# Altium PCB Sunfish_ECU_RevA.PcbDoc (part 2 of 2)
Units mil, origin at the board's own origin, x right, y up, seen from the top; angles counter-clockwise.
Board outline 3150 x 5900 mil, 4 copper layers (Top Layer, GND, Power, Bottom Layer); 197 components, 100 nets, 618 pads, 220 vias.
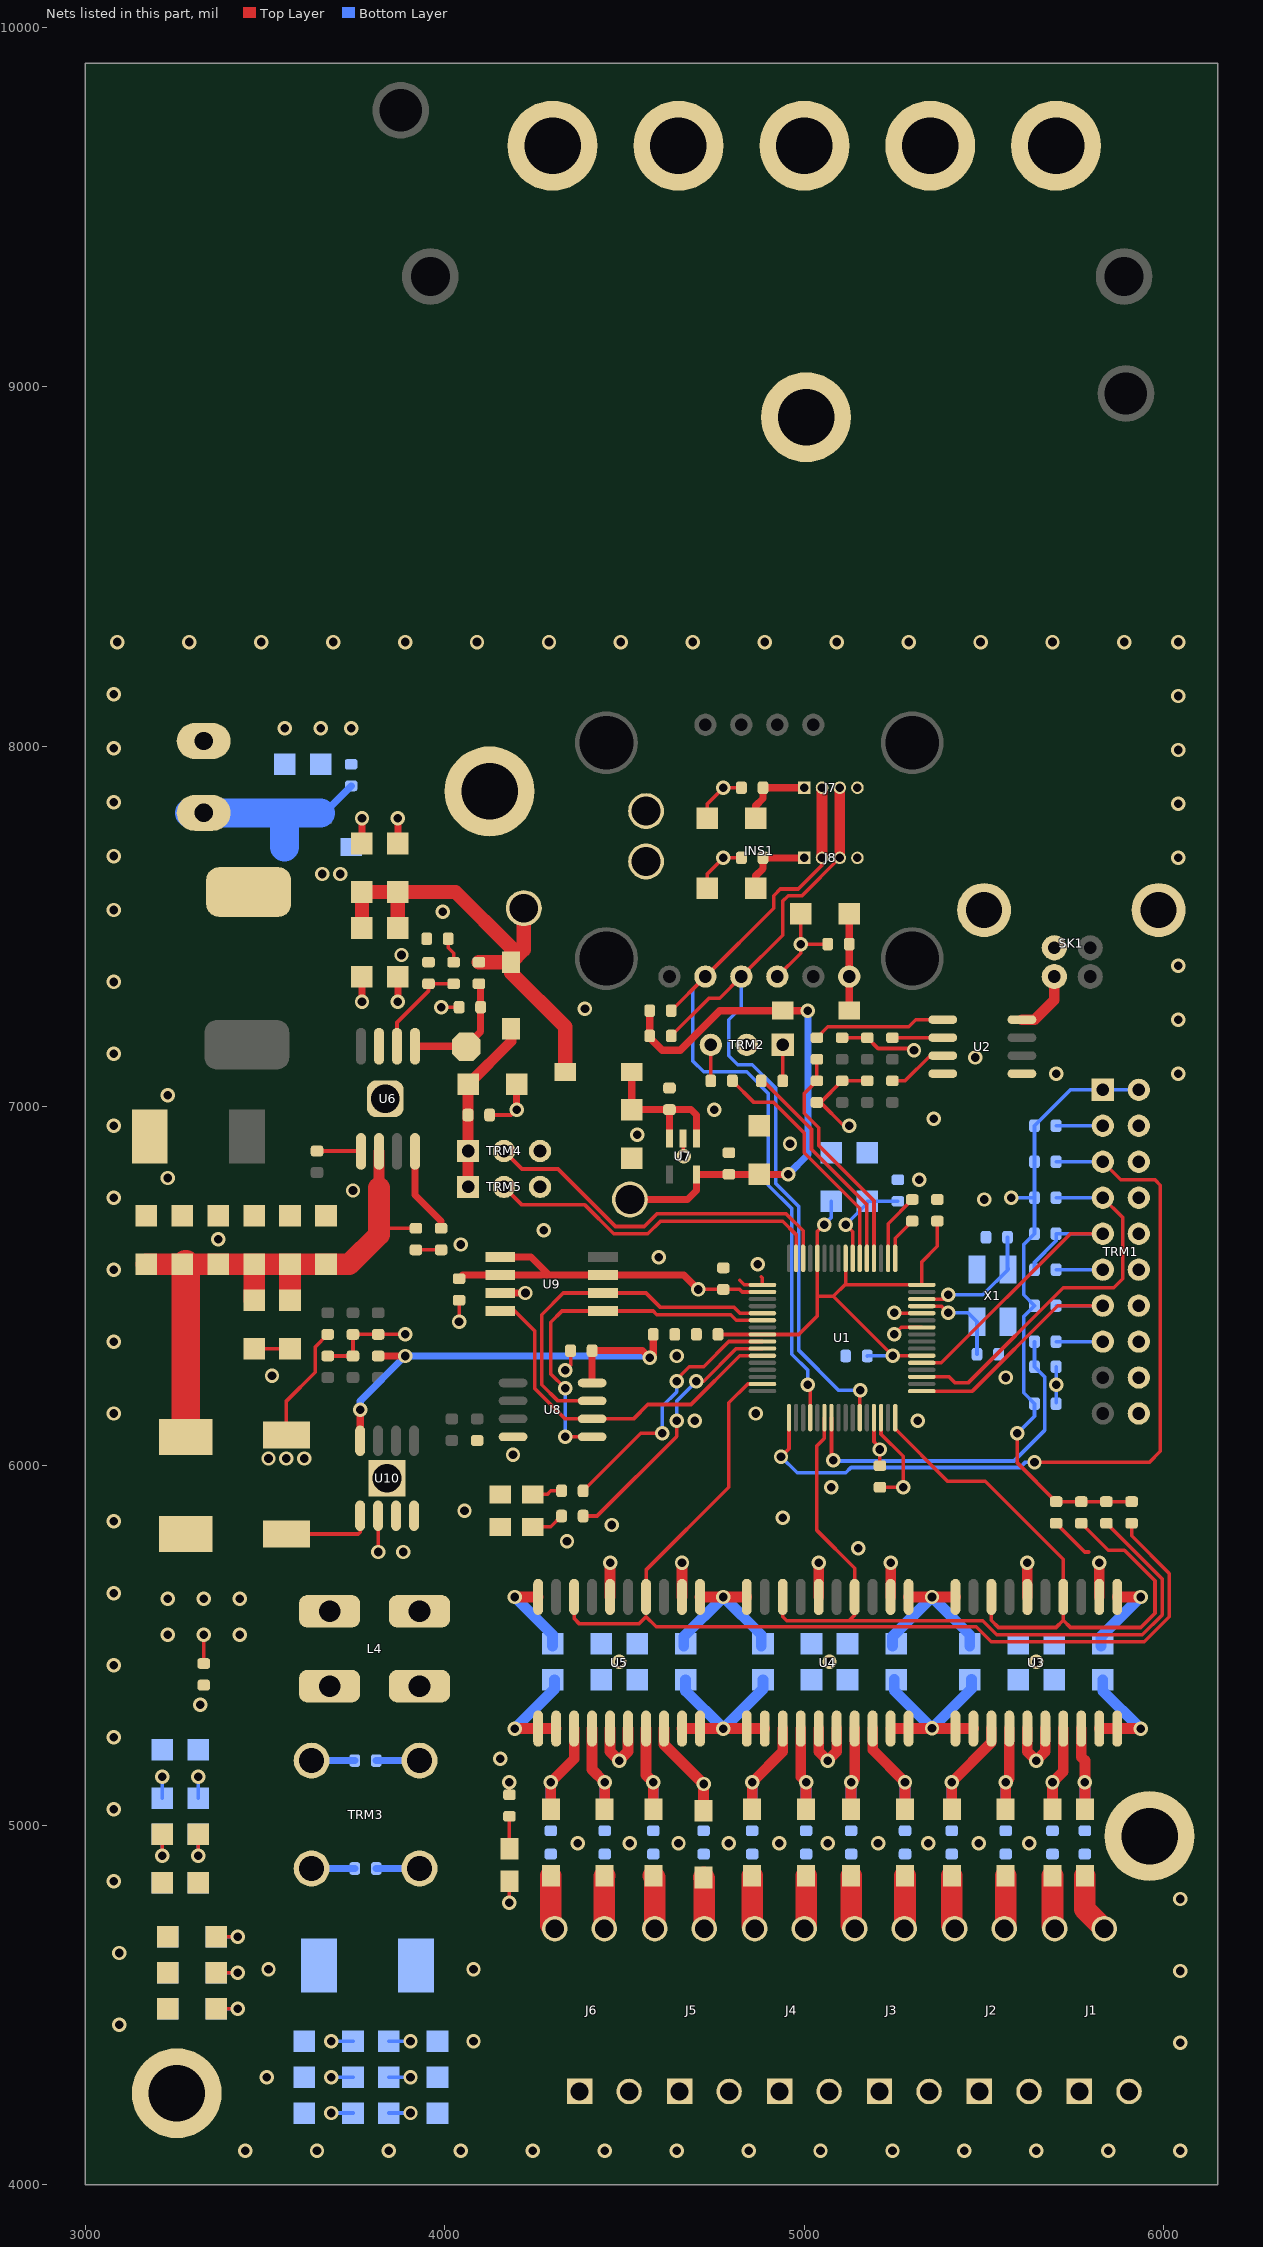
[diagram p4: the nets of this part, all layers, seen from the top]

## Via types
v1: diameter 40, hole 24, Top Layer to Bottom Layer, tented both sides, 220 vias

## Nets (pads, with @x,y where several pads share a name; then routed paths per layer and width w, separated by ;. In a path a pad name is that pad's centre, name@x,y a point inside that pad or via, vN(x,y) a via of type N, cw(c..) or ccw(c..) an arc to the next point about the centre after c; other vN are vias at no path point) (continued)
GND: C1.2 C2.2 C3.2 C4.2 C5.2 C6.2 C7.2 C8.2 C9.2 C10.2 C11.2 C12.2 C13.2 C14.2 C15.2 C16.2 C17.2 C18.2 C19.2 C20.2 C21.2 C22.2 C23_UF1.2 C23_UF2.2 C23_UF3.2 C23_UF4.2 C23_UF5.2 C23_UF6.2 C23_UF7.2 C23_UF8.2 C23_UF9.2 C23_UF10.2 C23_UF11.2 C23_UF12.2 C24_UF1.2 C24_UF2.2 C24_UF3.2 C24_UF4.2 C24_UF5.2 C24_UF6.2 C24_UF7.2 C24_UF8.2 C24_UF9.2 C24_UF10.2 C24_UF11.2 C24_UF12.2 C25.2 C26.2 C28.2 C29.2 C30.2 C31.2 C32.2 C33.2 C34.2 C35.2 C36.2 C37.2 C38.2 C39.2 C40.2 C41.2 C42.2 C43.2 C44.2 C45.2 C46.2 C47.2 C49.2 C50.2 C51.2 C52.2 C53.2 C55.2 C56.2 C57.2 C58.2 C59.2 C60.2 C61.2 C62.2 C63.2 C64.2 C65.2 C66.2 C67.2 C68.2 C69.2 C70.2 C71.2 C72.2 C73.2 C74.2 C75.2 C76.2 C77.2 C78.2 C79.2 C80.2 C81.2 C82.2 C83.2 C84.2 C85.2 C86.2 C87.2 C88.2 C110.2 D2.A INS1.3 J1.1 J1.2 J2.1 J2.2 J3.1 J3.2 J4.1 J4.2 J5.1 J5.2 J6.1 J6.2 J7.4 J8.4 L4.3 LD1.K LD2.K LD3.K pad.0@3255,4255 pad.0@3840,5965 pad.0@4125,7875 pad.0@4300,9670 pad.0@4650,9670 pad.0@5000,9670 pad.0@5005,8915 pad.0@5350,9670 pad.0@5700,9670 pad.0@5960,4970 pad.1 pad.5 R1.1 R5.1 R6.1 R19.2 R24.1 R30.1 SK1.4 SK1.5 SK1.6 TRM1.4 TRM1.6 TRM1.8 TRM1.10 TRM1.12 TRM1.14 TRM1.16 TRM1.18 TRM1.20 TRM2.2 TRM4.3 TRM5.3 TRM6.2 U1.2 U1.17 U1.46 U1.60 U2.4 U2.5 U3.2 U3.6 U4.2 U4.6 U5.2 U5.6 U6.7 U6.9 U7.2 U8.4 U9.7 U10.3 U10.4 U10.9 X1.2 X1.4 | length 3741.4
  Top Layer w10: C85.2@3470,6325 C51.2@3570,6325 ; R30.1@3675,6305 C61.2@3745,6305 R24.1@3745,6365 C50.2@3815,6365 v1(3890,6365) ; C26.2@3910,6600 C26.2@3920,6600 C35.2@3990,6600 ; C34.2@3950,7460 C34.2@3950,7465 ; v1(3990,7275) R19.2@4040,7275 ; v1(4040,6400) C47.2@4040,6460 ; C44.2@4125,6975 4185,6975 v1(4200,6990) ; v1(4180,4785) LD2.K@4180,4845 ; v1(4335,6265) 4350,6280 C41.2@4350,6320 ; U7.2@4662.99,6910 4662.99,6862.01 v1(4665,6860) ; C83.2@4730,7605 4730,7645 v1(4775,7690) C88.2@4825,7690 ; C86.2@4730,7800 4730,7840 v1(4775,7885) C87.2@4825,7885 ; 4820.47,6515.49 4833.32,6502.64 U1.17@4883.54,6502.64 4883.54,6521.46 4880,6525 ; INS1.3@4925,7360 4990,7425 v1(4990,7450) ; C46.2@4990,7535 v1(4990,7450) ; C45.2@5065,7450 v1(4990,7450) ; R5.1@5105,7190 C2.2@5175,7190 5205,7160 5300,7160 v1(5305,7155) ; v1(5125,6945) 5110,6945 5045,7010 R6.1@5105,7070 C1.2@5175,7070 ; C4.2@5210,5940 v1(5275,5940) 5275,6025.96 5213.27,6087.69 U1.46@5213.27,6133.54 ; U1.2@5232.95,6576.46 5232.95,6672.95 C16.2@5300,6740 ; v1(5250,6425) 5251.1,6423.9 U1.60@5326.46,6423.9 ; C7.2@5700,5840 5780,5760 5790,5760
  Top Layer w20: v1(3770,7290) C31.2@3770,7360 ; C29.2@3770,7730 v1(3770,7800) ; v1(3870,7290) C30.2@3870,7360 ; C32.2@3870,7730 v1(3870,7800) ; U9.7@4154.57,6480 v1(4224.57,6480) ; v1(4200,6990) C43.2@4200,7060
  Top Layer w30: U5.6@4460,5635 v1(4460,5730) ; U5.2@4660,5635 v1(4660,5730) ; U4.6@5040,5635 v1(5040,5730) ; U4.2@5240,5635 v1(5240,5730) ; U3.6@5620,5635 v1(5620,5730) ; U3.2@5820,5635 v1(5820,5730)
  Bottom Layer w10: C8.2@5700,6175 v1(5700,6225) C3.2@5700,6275
  other v1: 3445,4095 3645,4095 3845,4095 4045,4095 4245,4095 4445,4095 4645,4095 4845,4095 5045,4095 5245,4095 5445,4095 5645,4095 5845,4095 6045,4095 3505,4300 6045,4395 4080,4400 3095,4445 6045,4595 3510,4600 4080,4600 3095,4645 6045,4795 3080,4845 4370,4950 4515,4950 4650,4950 4790,4950 4930,4950 5065,4950 5205,4950 5345,4950 5485,4950 5625,4950 3080,5045 4155,5185 3080,5245 3320,5335 3080,5445 4485,5455 5070,5455 5645,5455 3080,5645 3885,5760 5150,5770 4340,5790 4465,5835 3080,5845 4940,5855 4055,5875 5075,5940 4190,6030 4695,6125 5315,6125 3080,6145 4865,6145 5560,6245 3520,6250 4645,6305 3080,6345 3080,6545 4870,6560 4595,6580 4045,6615 3370,6630 4275,6655 5500,6740 3080,6745 3745,6765 5320,6795 3230,6800 4960,6895 4535,6920 3080,6945 5360,6965 4750,6990 3230,7030 5700,7090 6040,7090 5475,7135 3080,7145 6040,7240 4390,7270 3080,7345 6040,7390 3880,7420 3995,7540 3080,7545 6040,7690 3080,7695 6040,7840 3080,7845 6040,7990 3080,7995 3555,8050 3655,8050 3740,8050 6040,8140 3080,8145 3090,8290 3290,8290 3490,8290 3690,8290 3890,8290 4090,8290 4290,8290 4490,8290 4690,8290 4890,8290 5090,8290 5290,8290 5490,8290 5690,8290 5890,8290 6040,8290
LED_1: R31.1 U1.26 | length 749
  Top Layer w10: R31.1@4385,5860 4423.75,5860 4645,6081.25 v1(4645,6125) ; v1(4700,6235) 4720,6235 4810,6325 4825.47,6325 ; 4825.47,6325.47 U1.26@4883.54,6325.47
  Bottom Layer w10: v1(4645,6125) 4645,6180 v1(4700,6235)
LED_2: R14.1 U1.25 | length 756.7
  Top Layer w10: R14.1@4385,5930 4545,6090 v1(4605,6090) ; v1(4645,6235) 4645,6240 4680.35,6275.35 ; 4665,6260 4680.35,6275.35 ; U1.25@4883.54,6345.16 4790.16,6345.16 4720.35,6275.35 4680.35,6275.35
  Bottom Layer w10: v1(4605,6090) 4605,6165 4645,6205 v1(4645,6235)
MISO: U1.27 U8.6 U9.8 | length 1019.8
  Top Layer w10: U9.8@4154.57,6430 4195,6430 4250,6375 4250,6215 4335,6130 U8.6@4410,6130 4525,6130 4565,6170 4685,6170 4820.79,6305.79 U1.27@4883.54,6305.79
MOSI: U1.22 U8.5 U9.1 | length 1022.5
  Top Layer w10: v1(4335,6080) U8.5@4410,6080 ; v1(4335,6215) 4295,6255 4295,6398.7 4326.3,6430 U9.1@4440,6430 4535,6430 4580,6430 4590,6420 4795,6420 4810.79,6404.21 U1.22@4883.54,6404.21
  Bottom Layer w10: v1(4335,6080) v1(4335,6215)
MOTOROUT1: C24_UF1.1 J1.3 L1_UF1.2 | length 339.1
  Top Layer w60: L1_UF1.2@5780,4860 5780,4766.66 J1.3@5833.9,4712.76
  Bottom Layer w10: C24_UF1.1@5780,4860 5780,4766.66 J1.3@5833.9,4712.76
MOTOROUT2: C24_UF2.1 J1.4 L1_UF2.2 | length 299.5
  Top Layer w60: L1_UF2.2@5690,4860 5690,4718.86 J1.4@5696.11,4712.76
  Bottom Layer w10: C24_UF2.1@5690,4860 5690,4718.86 J1.4@5696.11,4712.76
MOTOROUT3: C24_UF3.1 J2.3 L1_UF3.2 | length 299.2
  Top Layer w60: J2.3@5555,4711.86 J2.3@5555.9,4712.76 5560,4716.86 L1_UF3.2@5560,4860
  Bottom Layer w10: J2.3@5555.9,4712.76 5560,4716.86 C24_UF3.1@5560,4860
MOTOROUT4: C24_UF4.1 J2.4 L1_UF4.2 | length 301.2
  Top Layer w60: L1_UF4.2@5410,4860 5410,4720.86 J2.4@5418.11,4712.76
  Bottom Layer w10: C24_UF4.1@5410,4860 5410,4720.86 J2.4@5418.11,4712.76
MOTOROUT5: C24_UF5.1 J3.3 L1_UF5.2 | length 296.2
  Top Layer w60: J3.3@5277.9,4712.76 5280,4714.86 L1_UF5.2@5280,4860
  Bottom Layer w10: J3.3@5277.9,4712.76 5280,4714.86 C24_UF5.1@5280,4860
MOTOROUT6: C24_UF6.1 J3.4 L1_UF6.2 | length 302.9
  Top Layer w60: L1_UF6.2@5130,4860 5130,4722.65 J3.4@5140,4712.65
  Bottom Layer w10: C24_UF6.1@5130,4860 5130,4722.86 J3.4@5140.1,4712.76
MOTOROUT7: C24_UF7.1 J4.3 L1_UF7.2 | length 298.7
  Top Layer w60: J4.3@4999.9,4712.76 5005,4717.86 L1_UF7.2@5005,4860
  Bottom Layer w10: J4.3@4999.9,4712.76 5005,4717.86 C24_UF7.1@5005,4860
MOTOROUT8: C24_UF8.1 J4.4 L1_UF8.2 | length 300.4
  Top Layer w60: L1_UF8.2@4855,4860 4855,4719.86 J4.4@4862.1,4712.76
  Bottom Layer w10: C24_UF8.1@4855,4860 4855,4719.86 J4.4@4862.1,4712.76
MOTOROUT9: C24_UF9.1 J5.3 L1_UF9.2 | length 291.1
  Top Layer w60: L1_UF9.2@4720,4855 4721.9,4853.1 J5.3@4721.9,4712.76
  Bottom Layer w10: C24_UF9.1@4720,4860 4720,4714.65 J5.3@4721.9,4712.76
MOTOROUT10: C24_UF10.1 J5.4 L1_UF10.2 | length 297.9
  Top Layer w60: L1_UF10.2@4580,4860 4584.1,4855.9 J5.4@4584.1,4712.76
  Bottom Layer w10: C24_UF10.1@4580,4860 4580,4716.86 J5.4@4584.1,4712.76
MOTOROUT11: C24_UF11.1 J6.3 L1_UF11.2 | length 295.4
  Top Layer w60: J6.3@4443.9,4712.76 4443.9,4858.9 L1_UF11.2@4445,4860
  Bottom Layer w10: J6.3@4443.9,4712.76 4445,4713.86 C24_UF11.1@4445,4860
MOTOROUT12: C24_UF12.1 J6.4 L1_UF12.2 | length 304.3
  Top Layer w60: L1_UF12.2@4295,4860 4295,4721.65 J6.4@4305,4711.65
  Bottom Layer w10: C24_UF12.1@4295,4860 4295,4723.86 J6.4@4306.1,4712.76
NetC16_1: C16.1 U1.1 | length 123.2
  Top Layer w10: U1.1@5252.64,6576.46 5252.64,6632.64 C16.1@5300,6680
NetC25_1: C25.1 C26.1 C28.1 C42.1 C51.1 C52.1 C53.1 C85.1 C110.1 D1.K U6.2 | length 1695.6
  Top Layer w10: 3817.41,6660 C26.1@3920,6660
  Top Layer w30: 3817.41,6772.59 U6.2@3817.41,6873.9
  Top Layer w60: C52.1@3170,6560 C53.1@3270,6560 3280,6560 C28.1@3370,6560 C25.1@3470,6560 ; C85.1@3470,6460 C25.1@3470,6560 ; C51.1@3570,6460 C110.1@3570,6560 ; 3817.41,6772.59 3817.41,6660 3817.41,6642.41 3735,6560 C42.1@3670,6560 C110.1@3570,6560 ; C25.1@3470,6560 C110.1@3570,6560
  Top Layer w80: D1.K@3280,6080 C53.1@3280,6560
NetC27_1: C27.1 U6.1 | length 122.9
  Top Layer w10: C27.1@3645,6875 3766.31,6875 U6.1@3767.41,6873.9
NetC33_1: C33.1 R18.2 U6.6 | length 280.2
  Top Layer w10: U6.6@3867.41,7166.1 3867.41,7232.41 3955,7320 C33.1@3955,7340 R18.2@4025,7340
NetC34_1: C34.1 R18.1 | length 71.2
  Top Layer w10: C34.1@4010,7465 4010,7440 4025,7425 R18.1@4025,7400
NetC35_1: C35.1 U6.4 | length 244
  Top Layer w20: U6.4@3917.41,6873.9 3917.41,6752.59 3990,6680 C35.1@3990,6660
NetC38_1: C38.1 C39.1 L3.2 U7.1 U7.3 | length 436.2
  Top Layer w20: L3.2@4520,7095 C39.1@4520,6990 C38.1@4625,6990 ; U7.3@4625,6910 C38.1@4625,6990 ; U7.1@4700,6910 4700,6975 4685,6990 C38.1@4625,6990
NetC40_1: C40.1 D1.A L4.4 R20.1 U10.1 | length 332.7
  Top Layer w10: C40.1@3330,5450 v1(3330,5530) ; R20.1@3560,5810 3760,5810 3765,5815 U10.1@3765,5860.67
  other v1: 3230,5530 3430,5530 3230,5630 3330,5630 3430,5630
NetC45_1: C45.1 C46.1 INS1.1 L5.2 | length 270
  Top Layer w20: L5.2@5125,7265 INS1.1@5125,7360 C45.1@5125,7450 C46.1@5125,7535
NetC48_2: C48.2 C54.2 D3.A L4.2 TRM3.2 | length 240
  Bottom Layer w20: C48.2@3810,4880 TRM3.2@3930,4880 ; C54.2@3810,5180 TRM3.2@3930,5180
NetC62_1: C62.1 C63.1 C64.1 FB2.2 TRM6.1 | length 576.1
  Bottom Layer w20: C64.1@3655,7815 3665,7815 C63.1@3740,7890
  Bottom Layer w80: TRM6.1@3290,7815 C62.1@3555,7815 ; FB2.2@3555,7720 C62.1@3555,7815 ; C64.1@3655,7815 C62.1@3555,7815
NetLD1_A: LD1.A R14.2 | length 84.1
  Top Layer w10: LD1.A@4245,5920 4285,5920 4295,5930 R14.2@4325,5930
NetLD2_A: LD2.A R21.1 | length 90
  Top Layer w10: LD2.A@4180,4935 R21.1@4180,5025
NetLD3_A: LD3.A R31.2 | length 92.4
  Top Layer w10: LD3.A@4245,5830 4295,5830 R31.2@4325,5860
NetR2_1: R2.1 U2.1 | length 370.7
  Top Layer w10: R2.1@5035,7190 5065,7220 5290,7220 5310,7240 U2.1@5385,7240
NetR3_1: R3.1 U2.2 | length 140
  Top Layer w10: R3.1@5245,7190 U2.2@5385,7190
NetR4_1: R4.1 U2.3 | length 169
  Top Layer w10: R4.1@5245,7070 5280,7070 5350,7140 U2.3@5385,7140
NetR13_1: R13.1 TRM1.15 | length 130
  Bottom Layer w10: R13.1@5700,6345 TRM1.15@5830,6345
NetR15_2: R15.2 TRM2.1 | length 100
  Top Layer w10: R15.2@4940,7070 TRM2.1@4940,7170
NetR16_2: R16.2 TRM2.3 | length 100
  Top Layer w10: R16.2@4740,7070 TRM2.3@4740,7170
NetR17_1: R17.1 R19.1 TP1.1 U6.5 | length 334.5
  Top Layer w20: U6.5@3917.41,7166.1 4058.9,7166.1 4100,7207.2 R19.1@4100,7275 4100,7335 R17.1@4095,7340
OUT1: C23_UF1.1 L1_UF1.1 U3.18 | length 303
  Top Layer w30: U3.18@5770,5268.86 5770,5190 5780,5180 v1(5780,5120) L1_UF1.1@5780,5045
  Bottom Layer w30: C23_UF1.1@5780,5045 v1(5780,5120)
OUT2: C23_UF2.1 L1_UF2.1 U3.17 | length 311.3
  Top Layer w30: L1_UF2.1@5690,5045 v1(5690,5120) 5720,5150 U3.17@5720,5268.86
  Bottom Layer w30: C23_UF2.1@5690,5045 v1(5690,5120)
OUT3: C23_UF3.1 L1_UF3.1 U3.14 | length 303
  Top Layer w30: L1_UF3.1@5560,5045 v1(5560,5120) 5570,5130 U3.14@5570,5268.86
  Bottom Layer w30: C23_UF3.1@5560,5045 v1(5560,5120)
OUT4: C23_UF4.1 L1_UF4.1 U3.13 | length 344.4
  Top Layer w30: L1_UF4.1@5410,5045 v1(5410,5120) 5520,5230 U3.13@5520,5268.86
  Bottom Layer w30: C23_UF4.1@5410,5045 v1(5410,5120)
OUT5: C23_UF5.1 L1_UF5.1 U4.18 | length 336.1
  Top Layer w30: U4.18@5190,5268.86 5190,5210 v1(5280,5120) L1_UF5.1@5280,5045
  Bottom Layer w30: C23_UF5.1@5280,5045 v1(5280,5120)
OUT6: C23_UF6.1 L1_UF6.1 U4.17 | length 303
  Top Layer w30: L1_UF6.1@5130,5045 v1(5130,5120) 5140,5130 U4.17@5140,5268.86
  Bottom Layer w30: C23_UF6.1@5130,5045 v1(5130,5120)
OUT7: C23_UF7.1 L1_UF7.1 U4.14 | length 305.1
  Top Layer w30: U4.14@4990,5268.86 4990,5135 v1(5005,5120) L1_UF7.1@5005,5045
  Bottom Layer w30: C23_UF7.1@5005,5045 v1(5005,5120)
OUT8: C23_UF8.1 L1_UF8.1 U4.13 | length 334.1
  Top Layer w30: L1_UF8.1@4855,5045 v1(4855,5120) 4940,5205 U4.13@4940,5268.86
  Bottom Layer w30: C23_UF8.1@4855,5045 v1(4855,5120)
OUT9: C23_UF9.1 L1_UF9.1 U5.18 | length 344.4
  Top Layer w30: U5.18@4610,5268.86 4610,5225 v1(4720,5115) L1_UF9.1@4720,5040
  Bottom Layer w30: C23_UF9.1@4720,5045 v1(4720,5115)
OUT10: C23_UF10.1 L1_UF10.1 U5.17 | length 307.1
  Top Layer w30: U5.17@4560,5268.86 4560,5140 v1(4580,5120) L1_UF10.1@4580,5045
  Bottom Layer w30: C23_UF10.1@4580,5045 v1(4580,5120)
OUT11: C23_UF11.1 L1_UF11.1 U5.14 | length 313.4
  Top Layer w30: U5.14@4410,5268.86 4410,5155 v1(4445,5120) L1_UF11.1@4445,5045
  Bottom Layer w30: C23_UF11.1@4445,5045 v1(4445,5120)
OUT12: C23_UF12.1 L1_UF12.1 U5.13 | length 325.8
  Top Layer w30: L1_UF12.1@4295,5045 v1(4295,5120) 4360,5185 U5.13@4360,5268.86
  Bottom Layer w30: C23_UF12.1@4295,5045 v1(4295,5120)
OUT_STATUS1: R26.2 U1.48 U3.4 U3.8 | length 1744.9
  Top Layer w10: U1.48@5252.64,6133.54 5252.64,6102.36 5398,5957 5503,5957 5720,5740 U3.4@5720,5635 5720,5570 ; U3.8@5520,5635 5520,5570 5540,5550 5700,5550 5720,5570 ; R26.2@5765,5840 R26.2@5767.5,5837.5 ; R26.2@5770,5840 5845,5765 5890,5765 5975,5680 5975,5590 5935,5550 5740,5550 5720,5570
OUT_STATUS2: R27.2 U1.38 U4.4 U4.8 | length 2100.9
  Top Layer w10: U4.8@4940,5635 4940,5580 4950.94,5569.06 5124.06,5569.06 ; U1.38@5055.79,6133.54 5055.79,6075.79 5035,6055 5035,5820 5140,5715 U4.4@5140,5635 5140,5585 5124.06,5569.06 ; R27.2@5845,5840 R27.2@5840,5840 5995,5685 5995,5585 5940,5530 5535,5530 5495.94,5569.06 5124.06,5569.06
OUT_STATUS3: R28.2 U1.31 U5.4 U5.8 | length 2841.1
  Top Layer w10: U5.8@4360,5635 4360,5575 4375,5560 4540,5560 4560,5580 4587.94,5552.06 5477.94,5552.06 5520,5510 5945,5510 6015,5580 6015,5700 5910,5805 R28.2@5910,5840 ; U5.4@4560,5635 4560,5710 4790,5940 4790,6174.53 4842.52,6227.05 U1.31@4883.54,6227.05
RST: C3.1 R13.2 U1.39 | length 1003.1
  Top Layer w10: U1.39@5075.47,6133.54 5075.47,6019.53 v1(5080,6015)
  Bottom Layer w10: v1(5080,6015) 5082,6013 5583,6013 5668,6098 5668,6247 C3.1@5640,6275 R13.2@5640,6345
RTCK: R12.1 TRM1.11 | length 130
  Bottom Layer w10: R12.1@5700,6545 TRM1.11@5830,6545
SCLK: U1.21 U8.7 U9.2 | length 1015.3
  Top Layer w10: U8.7@4410,6180 4315,6180 4270,6225 4270,6420 4330,6480 U9.2@4440,6480 4560,6480 4600,6440 4805,6440 4821.1,6423.9 U1.21@4883.54,6423.9
SERVO_1: TRM4.2 U1.14 | length 1029.4
  Top Layer w10: TRM4.2@4165,6875 4215,6825 4315,6825 4475,6665 4555,6665 4590,6700 4950,6700 4996.73,6653.27 U1.14@4996.73,6576.46
SERVO_2: TRM5.2 U1.15 | length 962.2
  Top Layer w10: TRM5.2@4165,6775 4215,6725 4390,6725 4470,6645 4565,6645 4600,6680 4940,6680 4977.05,6642.95 U1.15@4977.05,6576.46
TCK: R7.1 R12.2 TRM1.9 U1.53 | length 907.1
  Top Layer w10: U1.53@5326.46,6286.1 5381.1,6286.1 5740,6645 TRM1.9@5830,6645
  Bottom Layer w10: R12.2@5640,6545 5640,6565 5700,6625 R7.1@5700,6645 TRM1.9@5830,6645
TDI: R9.1 TRM1.5 U1.33 | length 2273.2
  Top Layer w10: v1(4935,6025) 4957.36,6047.36 U1.33@4957.36,6133.54 ; v1(5640,6010) 5960,6010 5990,6040 5990,6780 5975,6795 5880,6795 TRM1.5@5830,6845
  Bottom Layer w10: v1(4935,6025) 4980,5980 5115,5980 5130,5995 5600,5995 5615,6010 v1(5640,6010) ; R9.1@5700,6845 TRM1.5@5830,6845
TDO: R11.1 TRM1.13 U1.49 | length 732
  Top Layer w10: U1.49@5326.46,6207.36 5467.36,6207.36 5705,6445 TRM1.13@5830,6445
  Bottom Layer w10: R11.1@5700,6445 TRM1.13@5830,6445
TMS: R10.1 TRM1.7 U1.51 | length 1063.4
  Top Layer w10: U1.51@5326.46,6246.73 5403.27,6246.73 5420,6230 5455,6230 5720,6495 5860,6495 5885,6520 5885,6690 TRM1.7@5830,6745
  Bottom Layer w10: R10.1@5700,6745 TRM1.7@5830,6745
TRST: R8.1 TRM1.3 | length 130
  Bottom Layer w10: R8.1@5700,6945 TRM1.3@5830,6945
TWI_CLK: INS1.5 J7.2 J8.2 R25.1 U1.36 | length 2279.4
  Top Layer w10: R25.1@4630,7260 R25.1@4630,7265 INS1.5@4725,7360 4915,7550 4915,7585 4933.39,7603.39 4983.39,7603.39 5049.21,7669.21 J8.2@5049.21,7690 ; v1@5005,6225 v1(5010,6225) 5016.42,6218.58 U1.36@5016.42,6133.54
  Top Layer w30: J8.2@5049.21,7690 J7.2@5049.21,7885
  Bottom Layer w10: INS1.5@4725,7360 4690,7325 4690,7125 4720,7095 4840,7095 4900,7035 4900,6780 4965,6715 4965,6310 5010,6265 v1(5010,6225)
TWI_DATA: INS1.4 J7.3 J8.3 R23.1 U1.43 | length 2374
  Top Layer w10: R23.1@4630,7195 4735,7300 4765,7300 INS1.4@4825,7360 4940,7475 4940,7570 4955,7585 4993.43,7585 J8.3@5098.43,7690 ; U1.43@5154.21,6133.54 v1@5154.21,6209.21
  Top Layer w30: J8.3@5098.43,7690 J7.3@5098.43,7885
  Bottom Layer w10: INS1.4@4825,7360 4825,7275 4790,7240 4790,7140 4815,7115 4855,7115 4920,7050 4920,6785 4985,6720 4985,6320 5095,6210 v1(5155,6210)
USART_RX: R15.1 U1.5 | length 618.2
  Top Layer w10: R15.1@4880,7070 4885,7070 5020,6935 5020,6880 5173.9,6726.1 U1.5@5173.9,6576.46
USART_TX: R16.1 U1.6 | length 672.5
  Top Layer w10: R16.1@4800,7070 4860,7010 4915,7010 5000,6925 5000,6870 5154.21,6715.79 U1.6@5154.21,6576.46
USB_PWR: SK1.1 U2.8 | length 177.8
  Top Layer w30: U2.8@5605,7240 5640,7240 5695,7295 SK1.1@5695,7360
USB_SIGNAL: R1.2 R2.2 U1.4 | length 648.2
  Top Layer w10: R2.2@5035,7130 R1.2@5035,7070 5000,7035 5000,6980 5040,6940 5040,6890 5193.58,6736.42 U1.4@5193.58,6576.46
VCC_3V3: C4.1 C5.1 C6.1 C7.1 C8.1 C9.1 C36.1 C37.1 C41.1 C47.1 C49.1 C83.1 C86.1 C87.1 C88.1 J7.1 J8.1 L5.1 pad.3 R7.2 R8.2 R9.2 R10.2 R11.2 R23.2 R25.2 R26.1 R27.1 R28.1 R29.2 TRM1.1 TRM1.2 U1.7 U1.18 U1.45 U1.58 U7.5 U8.8 U9.3 U9.5 U9.6 U10.8 | length 6621.7
  Top Layer w10: v1(4705,6490) C5.1@4775,6490 4820.47,6490 4827.52,6482.95 U1.18@4883.54,6482.95 ; v1(5115,6670) 5134.53,6650.47 U1.7@5134.53,6576.46 ; U1.45@5193.58,6133.54 5193.58,6066.42 5210,6050 C4.1@5210,6000 ; v1(5250,6365) 5269.53,6384.53 U1.58@5326.46,6384.53 ; v1(5592.5,6090) 5592.5,6007.5 C7.1@5700,5900 R26.1@5770,5900 R27.1@5840,5900 R28.1@5910,5900
  Top Layer w20: U10.8@3765,6069.33 v1(3765,6155) ; R29.2@3815,6305 v1(3890,6305) ; C47.1@4040,6520 4050,6530 U9.6@4154.57,6530 4290,6530 ; U9.5@4154.57,6580 4240,6580 4290,6530 ; U8.8@4410,6230 C41.1@4410,6320 4550,6320 v1(4570,6300) 4580,6310 C49.1@4580,6365 ; pad.3@4515,6740 4675,6740 4700,6765 U7.5@4700,6810 C36.1@4790,6810 C37.1@4875,6810 v1(4955,6810) ; R25.2@4570,7260 4570,7190 4605,7155 4655,7155 4765,7265 L5.1@4940,7265 v1(5010,7265) ; v1(4705,6490) 4665,6530 U9.3@4440,6530 4290,6530 ; C83.1@4865,7605 4865,7640 4885,7660 C88.1@4885,7690 J8.1@5000,7690 ; C86.1@4865,7800 4865,7835 4885,7855 C87.1@4885,7885 J7.1@5000,7885
  Bottom Layer w10: v1(5115,6670) 5175,6730 C9.1@5175,6735 C6.1@5260,6735 ; v1(5575,6745) R10.2@5640,6745 ; v1(5592.5,6090) 5640,6137.5 C8.1@5640,6172.5 5610,6202.5 5610,6415 R11.2@5640,6445 5610,6475 5610,6615 R7.2@5640,6645 R10.2@5640,6745 ; TRM1.2@5930,7045 TRM1.1@5830,7045 5740,7045 R8.2@5640,6945 R9.2@5640,6845 R10.2@5640,6745
  Bottom Layer w20: v1(3765,6155) 3765,6180 v1(3890,6305) 4565,6305 v1(4570,6300) ; v1(4955,6810) 5010,6865 v1(5010,7265)
  other v1: 5210,6045
VCC_5V: C29.1 C30.1 C31.1 C32.1 FB1.1 FB2.1 L2.2 L3.1 pad.0@4220,7550 R17.2 | length 1340.8
  Top Layer w40: C31.1@3770,7495 C29.1@3770,7595 C32.1@3870,7595 ; C30.1@3870,7495 C32.1@3870,7595 ; R17.2@4095,7400 FB1.1@4185,7400 ; pad.0@4220,7550 4220,7435 FB1.1@4185,7400 ; L3.1@4335,7095 4335,7220 4185,7370 FB1.1@4185,7400 ; C32.1@3870,7595 4030,7595 4185,7440 FB1.1@4185,7400
  other v1: 3660,7645 3710,7645
VCC_12V: C17.1 C18.1 C19.1 C20.1 C21.1 C22.1 C55.1 C56.1 C57.1 C58.1 C59.1 C60.1 C65.1 C66.1 C67.1 C68.1 C69.1 C70.1 C71.1 C72.1 C73.1 C74.1 C75.1 C76.1 C77.1 C78.1 C79.1 C80.1 C81.1 C82.1 pad.4 R20.2 R21.2 R22.1 U3.1 U3.10 U3.11 U3.12 U3.15 U3.16 U3.19 U3.20 U4.1 U4.10 U4.11 U4.12 U4.15 U4.16 U4.19 U4.20 U5.1 U5.10 U5.11 U5.12 U5.15 U5.16 U5.19 U5.20 U10.2 | length 5386.6
  Top Layer w10: v1(3215,4915) C73.1@3215,4975 ; v1(3315,4915) C80.1@3315,4975 ; C65.1@3365,4490 v1(3425,4490) ; C66.1@3365,4590 v1(3425,4590) ; C67.1@3365,4690 v1(3425,4690) ; R20.2@3560,6085 3560,6180 3640,6260 3640,6330 R22.1@3675,6365 ; v1(3815,5760) U10.2@3815,5860.67 ; R21.2@4180,5085 v1(4180,5120)
  Top Layer w30: v1(4195,5268.86) U5.12@4310,5268.86 ; v1(4195,5635) U5.10@4260,5635 ; U5.15@4460,5268.86 4460,5205 v1(4485,5180) 4510,5205 U5.16@4510,5268.86 ; U5.19@4660,5268.86 U5.20@4710,5268.86 v1(4775,5268.86) U4.11@4840,5268.86 U4.12@4890,5268.86 ; U5.1@4710,5635 v1(4775,5635) U4.10@4840,5635 ; U4.15@5040,5268.86 5040,5205 v1(5065,5180) 5090,5205 U4.16@5090,5268.86 ; U4.19@5240,5268.86 U4.20@5290,5268.86 U3.11@5420,5268.86 U3.12@5470,5268.86 ; U4.1@5290,5635 U3.10@5420,5635 ; U3.15@5620,5268.86 5620,5205 v1(5645,5180) 5670,5205 U3.16@5670,5268.86 ; U3.19@5820,5268.86 v1(5935,5268.86) ; U3.1@5870,5635 v1(5935,5635)
  Bottom Layer w10: v1(3215,4915) C71.1@3215,4975 ; C82.1@3215,5075 v1(3215,5135) ; v1(3315,4915) C72.1@3315,4975 ; C81.1@3315,5075 v1(3315,5135) ; C69.1@3365,4490 v1(3425,4490) ; C70.1@3365,4590 v1(3425,4590) ; C68.1@3365,4690 v1(3425,4690) ; v1(3685,4200) C76.1@3745,4200 ; v1(3685,4300) C75.1@3745,4300 ; v1(3685,4400) C74.1@3745,4400 ; C77.1@3845,4200 v1(3905,4200) ; C78.1@3845,4300 v1(3905,4300) ; C79.1@3845,4400 v1(3905,4400)
  Bottom Layer w30: v1(4195,5268.86) 4305,5378.86 C21.1@4305,5405 ; v1(4195,5635) 4300,5530 C55.1@4300,5498.86 ; C56.1@4665,5498.86 4665,5525 v1(4775,5635) 4880,5530 C58.1@4880,5498.86 ; C22.1@4670,5405 4670,5373.86 v1(4775,5268.86) 4885,5378.86 C20.1@4885,5405 ; C19.1@5245,5498.86 5245,5525 v1(5355,5635) 5460,5530 C59.1@5460,5498.86 ; C57.1@5250,5406.14 5250,5375 v1(5355,5270) 5465,5380 C60.1@5465,5406.14 ; C17.1@5825,5498.86 5825,5525 v1(5935,5635) ; C18.1@5830,5405 5830,5373.86 v1(5935,5268.86)
  other v1: 3510,6020 3560,6020 3610,6020
VCC_IN: C48.1 C54.1 D3.K L4.1 TRM3.1 | length 240
  Bottom Layer w20: TRM3.1@3630,4880 C48.1@3750,4880 ; TRM3.1@3630,5180 C54.1@3750,5180
VCC_SERVO: C43.1 C44.1 FB1.2 TRM4.1 TRM5.1 | length 489.7
  Top Layer w30: TRM5.1@4065,6775 TRM4.1@4065,6875 C44.1@4065,6975 C43.1@4065,7060 4185,7180 FB1.2@4185,7215
VDD_CORE: C10.1 C11.1 C12.1 C13.1 U1.8 U1.12 U1.24 U1.54 U1.64 | length 1590.2
  Top Layer w10: C11.1@4760,6365 4760.16,6364.84 U1.24@4883.54,6364.84 4984.84,6364.84 5036.1,6416.1 5036.1,6471.1 ; v1(5055,6670) 5036.1,6651.1 U1.12@5036.1,6576.46 5036.1,6471.1 ; U1.8@5114.84,6576.46 5114.84,6505.16 ; U1.54@5326.46,6305.79 v1(5246.1,6305.79) 5080.79,6471.1 ; C12.1@5370,6680 5370,6610 5326.46,6566.46 U1.64@5326.46,6502.64 5117.36,6502.64 5114.84,6505.16 ; 5036.1,6471.1 5080.79,6471.1 ; 5080.79,6471.1 5114.84,6505.16
  Bottom Layer w10: v1(5055,6670) 5075,6690 C10.1@5075,6735 ; C13.1@5175,6305 5175.79,6305.79 v1(5246.1,6305.79)
XIN: C15.1 U1.62 X1.3 | length 369.3
  Top Layer w10: U1.62@5326.46,6463.27 5388.27,6463.27 v1(5400,6475)
  Bottom Layer w10: v1(5400,6475) 5495.94,6475 X1.3@5566.61,6545.67 ; C15.1@5565,6635 X1.3@5565,6550 ; X1.3@5565,6550 5566.61,6548.39 X1.3@5566.61,6545.67 ; X1.3@5565,6550 5565,6547.28 X1.3@5566.61,6545.67
XOUT: C14.1 U1.61 X1.1 | length 261.6
  Top Layer w10: U1.61@5326.46,6443.58 5381.42,6443.58 v1(5400,6425)
  Bottom Layer w10: v1(5400,6425) 5455,6425 X1.1@5480,6400 C14.1@5480,6310
pads on no net: INS1.0 INS1.2 INS1.6 INS1.7 INS1.8 INS1.9 INS1.10 SBC1.0 SBC2.0 TRM1.17 TRM1.19 U1.3 U1.9 U1.10 U1.11 U1.13 U1.19 U1.20 U1.40 U1.50 U1.55 U1.59 U1.63 U6.3 U7.4 U10.6

## Polygon pours and split planes (outlines as drawn)
VDD_CORE on Top Layer "VDD_CORE" (solid, remove dead copper, pour order 1008): 4908.15,6551.85 5301.85,6551.85 5301.85,6158.15 4908.15,6158.15
VCC_IN on Top Layer "VDD_CORE_TOP" (solid, remove dead copper, pour order 1004): 3390,5484.71 3774.89,5484.71 3775,5485 3772.21,5477.59 3772.21,4790 3390,4790
NetC48_2 on Top Layer "RETURN_TOP" (solid, remove dead copper, pour order 1005): 3790,5210.85 3790,5491.42 3804.2,5505 4017.25,5505 4050.39,5505 4050.39,5214.24 4050.39,4794.53 4050.39,4790 3790,4790
NetC40_1 on Top Layer "GND" (solid, remove dead copper, pour order 1000): 3790,5505 3790,5695 3660,5825 3600,5885 3140,5885 3140,5505
GND on Top Layer "GND" (solid, remove dead copper, pour order 1010): 3010,4000 6145,4000 6145,9900 3000,9900
5V_SW on Top Layer "5V_SW" (solid, remove dead copper, pour order 1000): 3785,7234.92 3785,7081.7 3725,7081.7 3605,6956.6 3605,6857.55 3563.83,6815.85 3542.77,6795 3342.66,6795 3290,6847.13 3290,7248.51 3326.86,7285 3700.74,7285 3721.81,7264.15 3737.61,7248.51 3742.87,7243.3 3774.47,7243.3
VCC_IN on Bottom Layer "VCC_IN_BOTTOM" (solid, remove dead copper, pour order 1001): 3390,5484.71 3774.89,5484.71 3775,5485 3772.21,5477.59 3772.21,4790 3390,4790
NetC48_2 on Bottom Layer "RETURN_BOTTOM" (solid, remove dead copper, pour order 1002): 3790,5210.85 3790,5491.42 3804.2,5505 4017.25,5505 4050.39,5505 4050.39,5214.24 4050.39,4794.53 4050.39,4790 3790,4790
NetC40_1 on Bottom Layer "GND" (solid, remove dead copper, pour order 1001): 3790,5505 3790,5695 3660,5825 3600,5885 3140,5885 3140,5505
GND on Bottom Layer "GND" (solid, remove dead copper, pour order 1009): 3000,4000 6150,4000 6150,9900 3000,9900
GND on GND (split plane): 6109.91,4040.09 3040.09,4040.09 3040.09,9859.91 6109.91,9859.91
NetC48_2 on GND (split plane): 4089.93,4800.07 3805.07,4800.07 3805.07,5489.93 4089.93,5489.93
VCC_12V on Power (split plane): 6109.91,7960.07 4670,7960.07 4667.06,7959.78 4664.23,7958.93 4661.63,7957.53 4659.34,7955.66 4657.47,7953.37 4656.07,7950.77 4655.22,7947.94 4654.93,7945 4654.93,6640.07 4500,6640.07 4497.06,6639.78 4494.23,6638.93 4491.63,6637.53 4489.34,6635.66 4487.47,6633.37 4486.07,6630.77 4485.22,6627.94 4484.93,6625 4484.93,6190 4485.22,6187.06 4486.07,6184.23 4487.47,6181.63 4489.34,6179.34 4491.63,6177.47 4494.23,6176.07 4497.06,6175.22 4500,6174.93 5109.93,6174.93 5109.93,5985 5110.22,5982.06 5111.07,5979.23 5112.47,5976.63 5114.34,5974.34 5116.63,5972.47 5119.23,5971.07 5122.06,5970.22 5125,5969.93 6109.91,5969.93 6109.91,4040.09 3040.09,4040.09 3040.09,9859.91 6109.91,9859.91
VCC_3V3 on Power (split plane): 6109.91,6000.07 5140.07,6000.07 5140.07,6190 5139.78,6192.94 5138.93,6195.77 5137.53,6198.37 5135.66,6200.66 5133.37,6202.53 5130.77,6203.93 5127.94,6204.78 5125,6205.07 4515.07,6205.07 4515.07,6609.93 4670,6609.93 4672.94,6610.22 4675.77,6611.07 4678.37,6612.47 4680.66,6614.34 4682.53,6616.63 4683.93,6619.23 4684.78,6622.06 4685.07,6625 4685.07,7929.93 6109.91,7929.93
VCC_IN on Power (split plane): 4059.93,4805.07 3415.07,4805.07 3415.07,5681.93 4059.93,5681.93

## Keep-outs
Keep-Out Layer:
  the board outline again, w10

## Other copper
Top Layer:
  rectangle net VCC_12V: 3470,6000 3650,6145
  rectangle net VCC_5V: 3320,7455 3920,7665
Bottom Layer:
  rectangle net VCC_IN: 3555,4525 3705,4815
  rectangle net NetC48_2: 3865,4530 3985,4815
  rectangle net VCC_5V: 3635,7620.94 3775,7750
GND (plane layer: these items are gaps in the copper):
  lines w30: 3850,4785 3790,4785 ; 3790,4785 3790,5505 4105,5505 4105,4785 3790,4785
Power (plane layer: these items are gaps in the copper):
  lines w30: 3000,5258.54 3000,5260 ; 6150,5985 5125,5985 5125,6190 4500,6190 ; 6150,7945 4670,7945 4670,6625 4500,6625 ; 4500,6190 4500,6625 ; 4500,6190 4500,6625 ; 3400,4790 3400,5697 4075,5697 4075,4790 3805,4790 3400,4790

## Silkscreen, mask and mechanical layers (free items; w line width, h text height)
Top Overlay:
  circle w10: c5892.76,8978.43 r93.19
  circle w10: c5892.76,8978.43 r107.73
  circle w10: c5892.76,8978.43 r103.07
  circle w10: c3875.43,9767.09 r103.07
  circle w10: c3875.43,9767.09 r107.73
  circle w10: c3875.43,9767.09 r93.19
  rectangle: 3025,8410 3455,9630
  lines w10: 3822.2,8499.45 3822.2,9660 ; 4512.8,4260 4653,4260 ; 4790.8,4260 4931,4260 ; 5068.8,4260 5209,4260 ; 5346.8,4260 5487,4260 ; 5624.8,4260 5765,4260
  text "SN:" at 3075,9840 h75 r270
  text "T. Burns" at 3480,9600 h75 r270
  text "RevA" at 3595,9595 h75 r270
  text "Sunfish ECU" at 3705,9590 h75 r270
  text "2016" at 3480,8795 h75 r270
  text "5V" at 3145,7850 h75 r90
  text "GND" at 4260,7755 h75
  text "++  --" at 3560,7690 h75 r90
  text "12V" at 4265,7650 h75
  text "5V" at 4300,7520 h75
  text "3V3" at 4615,6690 h75
  text "++" at 4200,4610 h75 r90
  text "--" at 4195,4155 h75 r90
  text "12" at 4335,4045 h50
  text "11" at 4485,4045 h50
  text "10" at 4615,4045 h50
  text "9" at 4775,4045 h50
  text "8" at 4915,4045 h50
  text "7" at 5055,4045 h50
  text "6" at 5190,4045 h50
  text "5" at 5335,4045 h50
  text "3" at 5605,4045 h50
  text "2" at 5745,4045 h50
  text "1" at 5895,4045 h50
  text "4" at 5465,4040 h50
  text "++  --" at 3550,4035 h75
Mechanical 1:
  the board outline again, w10
Mechanical 5:
  lines w10: 3000,4120 6150,4120 ; 3000,8525 6150,8525

## Dimensions
3000,4000 to 3080,9900 on Mechanical 1
3000,4000 to 6150,4000 on Mechanical 1
3000,4000 to 3000,9900 on Mechanical 1

## Text inside footprints (layer, text, board x,y; h text height)
SBC1: Top Overlay "ODROID XU4" at 3975,8135 h75; Top Overlay "ETH" at 3235,8265 h100
SBC2: Top Overlay "ETH" at 4096.61,8530.94 h100; Top Overlay "USB" at 5535.2,8549.84 h100; Top Overlay "USB" at 4831.65,8541.57 h100